# Altium PCB programmer-shield.PcbDoc
Units mil, origin at the board's own origin, x right, y up, seen from the top; angles counter-clockwise.
Board outline 2500 x 1550 mil, 2 copper layers (Top Layer, Bottom Layer), stack 61.756 mil thick; 17 components, 28 nets, 101 pads, 36 vias.
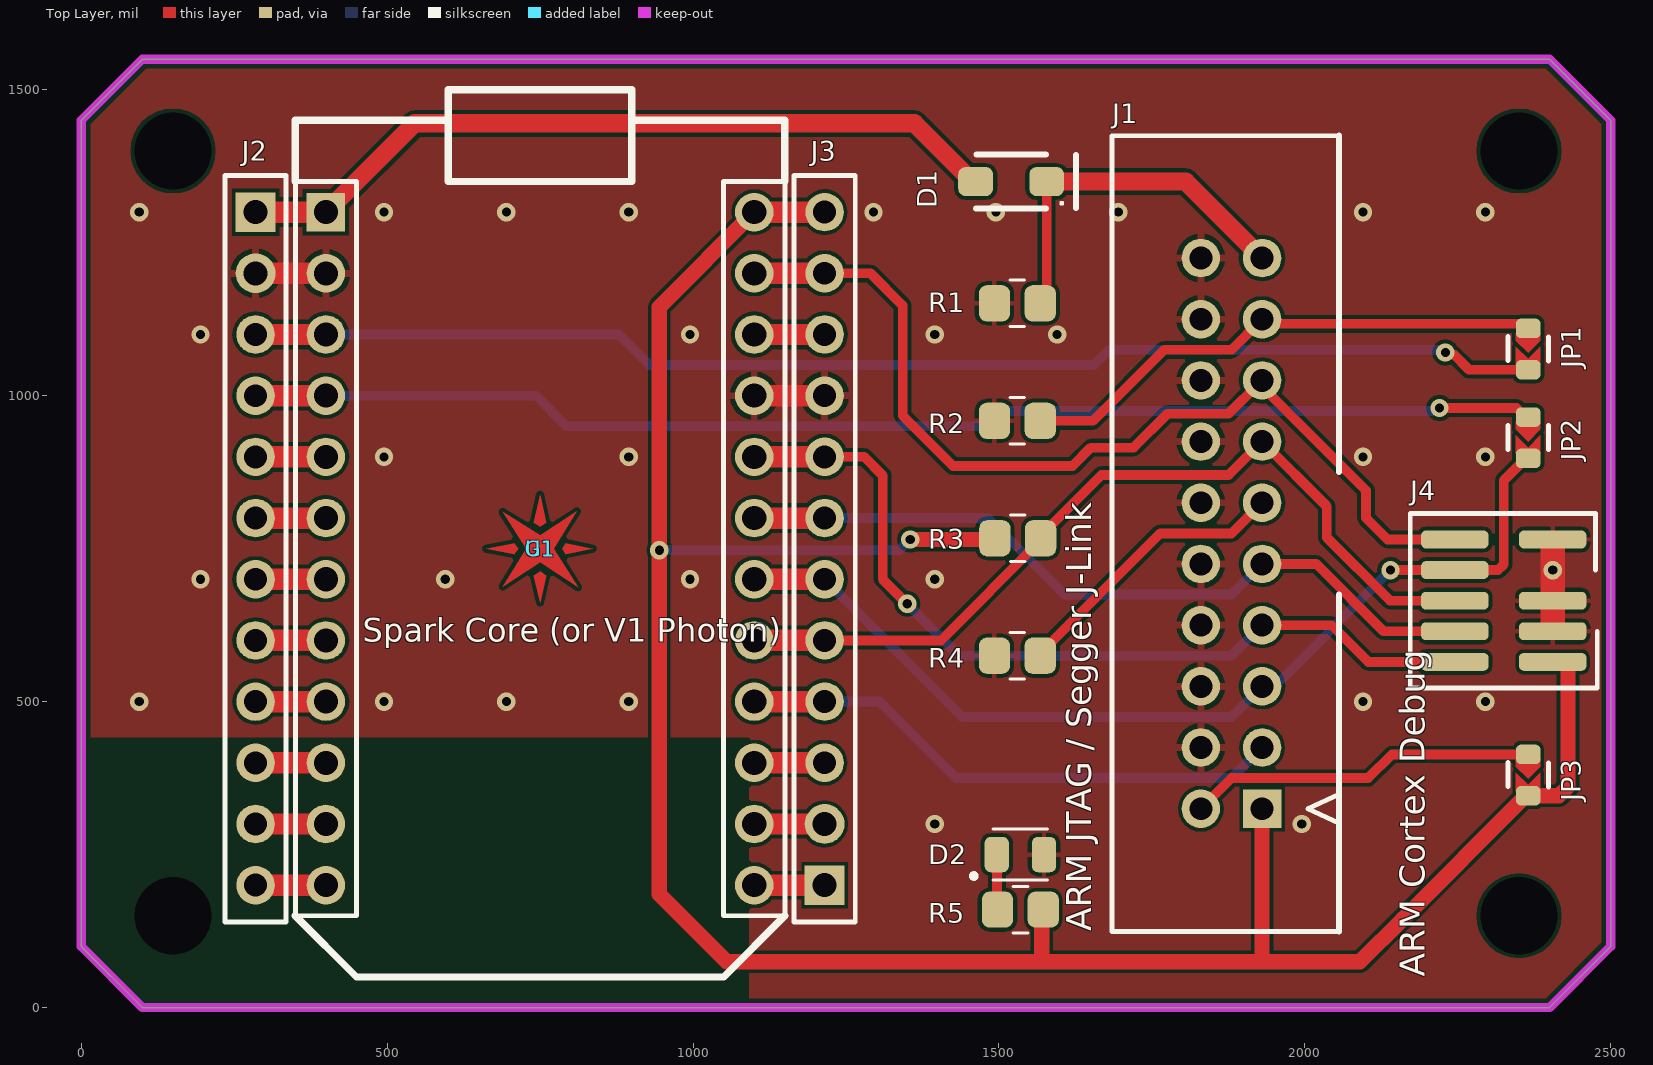
[diagram p0: Top Layer view]
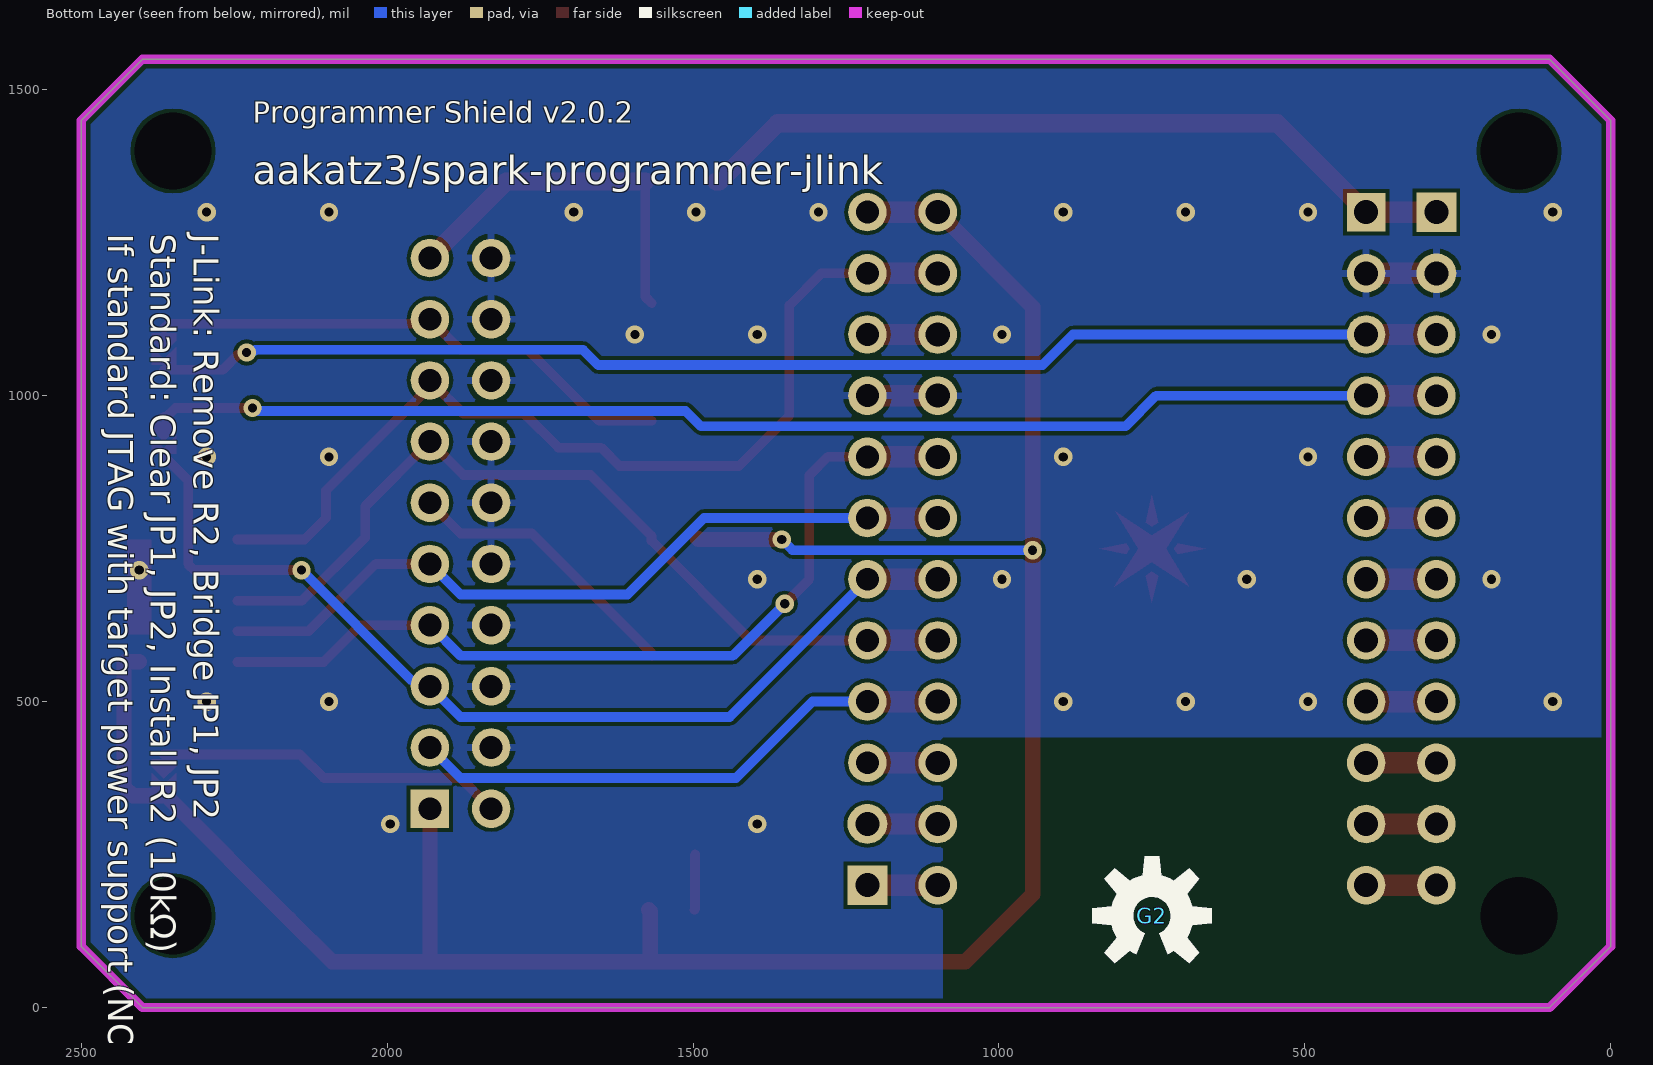
[diagram p1: Bottom Layer view, seen from below]

## Layer stack, top to bottom
Top Solder: solder mask 1, PSR-4000BN, Dk 4.5
Top Layer: signal copper 1.378
Dielectric 1: core 59, Kingboard KB6167F, Dk 4.5
Bottom Layer: signal copper 1.378
Bottom Solder: solder mask 1, PSR-4000BN, Dk 4.5

## Board outline
2400,1550 2500,1450 2500,100 2400,0 100,0 0,100 0,1450 100,1550

## Design rules (kind name [scope] priority, off if disabled: settings)
BoardOutlineClearance [All] p1: gap=15 ignorepadtopadclearanceinfootprint=FALSE
Clearance [All] p1: gap=6 ignorepadtopadclearanceinfootprint=FALSE except(0: Arc-Hole Track-Hole SMDPad-Hole THPad-Hole Via-Hole Fill-Hole Poly-Hole Region-Hole Text-Hole)
ComponentClearance [All] p1: gap=3 collisioncheckmode=3 verticalgap=3 showdistances=TRUE
DiffPairsRouting [All] p1: maxlimit=393.7 minlimit=6 mostfreqgap=8 toplayer_minwidth=6 toplayer_maxwidth=15 toplayer_prefwidth=8 bottomlayer_minwidth=6 bottomlayer_maxwidth=15 bottomlayer_prefwidth=8 maxuncoupledlength=500
Height [All] p1: minheight=0 maxheight=5000 prefheight=500
HoleSize [All] p1: absolutevalues=TRUE maxlimit=265 minlimit=10 maxpercent=80.000 minpercent=20.000
HoleToHoleClearance [All] p1: gap=10 allowstackedmicrovias=FALSE
MinimumAnnularRing [All] p1: minimumring=5
MinimumSolderMaskSliver [All] p1: minsoldermaskwidth=0
PasteMaskExpansion THT [IsThruPin] p1: expansion=-99999
PasteMaskExpansion [All] p2: expansion=0
PlaneClearance [All] p1: clearance=10
PlaneConnect [All] p1: planeconnectstyle=Direct reliefexpansion=16 reliefentries=4 reliefconductorwidth=6 reliefairgap=6
PolygonConnect [All] p1: thpad.connectstyle=Relief thpad.reliefconductorwidth=12 thpad.reliefentries=4 thpad.polygonreliefangle="90 Angle" thpad.airgapwidth=8 smdpad.connectstyle=Relief smdpad.reliefconductorwidth=8 smdpad.reliefentries=4 smdpad.polygonreliefangle="90 Angle" smdpad.airgapwidth=6 via.connectstyle=Direct via.reliefconductorwidth=8 via.reliefentries=4 via.polygonreliefangle="90 Angle" via.airgapwidth=6
RoutingCorners [All] p1: cornerstyle=45-Degree minsetback=49.21 maxsetback=49.21
RoutingVias [All] p1: holewidth=15 width=30 viastyle="Through Hole" minholewidth=13 minwidth=27 maxholewidth=100 maxwidth=114
SilkToSilkClearance [All] p1: silktosilkclearance=0
SilkToSolderMaskClearance [IsPad] p1: minsilkscreentomaskgap=6 clearancetoexposedcopper=TRUE
SolderMaskExpansion SolderMaskExpansion_1 [IsVia] p1: expansion=4 istentingtop=TRUE
SolderMaskExpansion [All] p2: expansion=2.95 istentingtop=FALSE
Width "Power Width" [InNetClass('Power')] p1: maxlimit=300 minlimit=8 preferedwidth=15 minimp=50.000000 maximp=50.000000 favimp=50.000000
Width [All] p2: maxlimit=400 minlimit=6 preferedwidth=8
18 further rules are at their usual default settings.

## Classes and differential pairs
net class Power: +3.3 +5 GND
polygon class PolygonThermal_ON_Width160000_Gap100000: Polygon_1_Net_GND Polygon_2_Net_GND

## Components (designator, comment, footprint, x,y, rotation, side; value= is the part's Value field where it differs from the comment)
D1 "1A 20V Schottky Diode" SOD-123FL 1520,1350 r180 top
D2 "SM0805GCL" LEDC2012X135N_SM0805GCL(Primary) 1535,250 r0 top
G1 "SPARK_LOGO_WITH_PLANE" SPARK_LOGO_PLUS_PLANE 750,750 r0 top locked
G2 "Open Source Hardware Logo This logo indicates the piece of hardware it is found on incorporates a OSHW license and/or adheres to the definition of open source hardware found here: http://freedomdefined.org/OSHW" OSHW-LOGO-M 750,150 r180 bottom locked
J1 "Arm® JTAG 20 connector" TST-110-01-G-D 1930,325 r90 top
J2 "12 contacts Female header" SSW-112-01-G-S 285,1300 r270 top
J3 "12 contacts Female header" SSW-112-01-G-S 1215,200.08 r90 top
J4 "Cortex Debug, 0.050\" 10 Pin" FTSH-105-01-F-DV-007-K 2325,665 r90 top
JP1 "0603 DNP" 0603_JP_Open 2365,1076.25 r90 top
JP2 "0603 DNP" 0603_JP_Open 2365,931.25 r90 top
JP3 "0603 DNP" 0603_JP_Open 2365,380 r90 top
R1 "RES 0805 10K 1%" 0805_RES 1530,1151 r0 top value=10K
R2 "RES 0805 10K 1%" 0805_RES 1530,959 r0 top value=10K
R3 "RES 0805 10K 1%" 0805_RES 1530.72,767 r180 top value=10K
R4 "RES 0805 10K 1%" 0805_RES 1530,575 r0 top value=10K
R5 "RES 0805 698 1%" 0805_RES 1535,160 r0 top value=698
U1 "Particle/Spark Core WiFi development board footprint" "SPARK_CORE _SOCKET" 750,750 r0 top locked

## Footprints (in the part's own frame and the unit in brackets; to place one, negate y for a bottom-side part, rotate by r counter-clockwise, add the part's x,y. Pads: shape width x height; smd on the part's side, far side on the other; paste and mask are expansions set on the pad)
0603_JP_Open [mil] "Jumper (Open/DNP)"
  rrect50% 32x40 smd paste-999: 1(33.75,0) 2(-33.75,0)
  Top Layer region: 26,20 13.75,20 -6.25,0 13.75,-20 26,-20
  Top Layer region: -26.25,0 -16.25,0 3.75,20 -26.25,20
  Top Layer region: -26.25,0 -16.25,0 3.75,-20 -25.75,-20
  silkscreen extent -19,-33 20,33, body extent -11,-59 -11,-59, height 236
0805_RES [mm]
  rrect50% 1.3x1.5 smd: 1(-0.95,0) 2(0.95,0)
  silkscreen extent -0.3,-0.97 0.3,0.97, body extent -1.09,-0.7 1.09,0.7, height 1.1
FTSH-105-01-F-DV-007-K [mil]
  rrect50% 29.13x109.84 smd: 1(-100,-80) 2(-100,80) 3(-50,-80) 4(-50,80) 5(0,-80) 6(0,80) 8(50,80) 9(100,-80) 10(100,80)
  silkscreen extent -143,-153 143,153, body extent -125,-115 125,115, height 241
LEDC2012X135N_SM0805GCL(Primary) [mm]
  rrect50% 1.01x1.47 smd: A(-0.98,0) C(0.98,0)
  silkscreen extent -2.03,-1.05 1.13,1.05, body extent -1,-0.62 1,0.62, height 1.12
OSHW-LOGO-M [mil]
  silkscreen extent -98,-78 98,98
SOD-123FL [mm] "SODFL, 2-Leads, Body 1.65x3.60mm, IPC Low Density"
  rrect50% 1.45x1.2 smd: A(-1.475,0) K(1.475,0)
  silkscreen extent -2.69,-1.12 1.45,1.12, body extent -1.8,-0.9 1.8,0.9, height 0.98
"SPARK_CORE _SOCKET" [mm]
  rect 1.6x1.6 hole 1: 1(-8.89,13.97)
  round 1.6 hole 1: 2(-8.89,11.43) 3(-8.89,8.89) 4(-8.89,6.35) 5(-8.89,3.81) 6(-8.89,1.27) 7(-8.89,-1.27) 8(-8.89,-3.81) 9(-8.89,-6.35) 10(-8.89,-8.89) 11(-8.89,-11.43) 12(-8.89,-13.97) 13(8.89,-13.97) 14(8.89,-11.43) 15(8.89,-8.89) 16(8.89,-6.35) 17(8.89,-3.81) 18(8.89,-1.27) 19(8.89,1.27) 20(8.89,3.81) 21(8.89,6.35) 22(8.89,8.89) 23(8.89,11.43) 24(8.89,13.97)
  silkscreen extent -10.16,-17.78 10.16,19.05, body extent -10.16,-17.78 10.16,19.26, height 15.7
SPARK_LOGO_PLUS_PLANE [mil]
  Top Layer region: 0,88 -10,42 0,36 10,42 0,88
  Top Layer region: 42,9 36,0 42,-9 86,0 42,9
  Top Layer region: -61,60 -23,0 -61,-62 0,-22 62,-63 22,0 60,61 0,22 -61,60
  Top Layer region: -88,0 -42,-9 -36,0 -42,9 -88,0
  Top Layer region: -10,-44 0,-88 10,-44 0,-37 -10,-44
SSW-112-01-G-S [mm]
  rect 1.65x1.65 / inner round 1.65 / far side rect 1.65x1.65 hole 1: 1(0,0)
  round 1.65 hole 1: 2(2.54,0)
  round 1.6 hole 0.95: 3(5.08,0) 4(7.62,0) 5(10.16,0) 6(12.7,0) 7(15.24,0) 8(17.78,0) 9(20.32,0) 10(22.86,0) 11(25.4,0) 12(27.94,0)
  silkscreen extent -1.52,-1.27 29.46,1.27, body extent -1.52,-1.21 29.46,1.21, height 8.51
TST-110-01-G-D [mm] "2.54mm pitch, 20 pin, header; shrouded"
  rect 1.6x1.6 / inner round 1.6 / far side rect 1.6x1.6 hole 0.95: 1(0,0)
  round 1.6 hole 0.95: 2(0,2.54) 3(2.54,0) 4(2.54,2.54) 5(5.08,0) 6(5.08,2.54) 7(7.62,0) 8(7.62,2.54) 9(10.16,0) 10(10.16,2.54) 11(12.7,0) 12(12.7,2.54) 13(15.24,0) 14(15.24,2.54) 15(17.78,0) 16(17.78,2.54) 17(20.32,0) 18(20.32,2.54) 19(22.86,0) 20(22.86,2.54)
  silkscreen extent -5.1,-3.2 27.94,6.22, body extent -5.08,-3.11 27.94,6.16, height 8.89

## Part data
D1: library part NRVB120VLSFT1G, "1A 20V Schottky Diode SOD-123FL", Manufacturer="On Semiconductor", Package Class="Surface Mount", PCB Package=SOD-123FL, Supplier Part Number 1=NRVB120VLSFT1GOSCT-ND, ComponentLink1Description="Manufacturer Website", ComponentLink2Description="Component Datasheet", ComponentLink2URL=https://www.onsemi.com/pub/Collateral/MBR120VLSFT1-D.PDF, ComponentLink3Description="Octopart Link", Description in Visual="1A 20V Schottky Diode SOD-123FL", Diode Configuration=Single, Grade="AEC-Q101 (Automotive - Discretes)", If (Amps)=1, Ifsm (Amps)=45, Manufacturer P/N=NRVB120VLSFT1G, P/N=NRVB120VLSFT1G, Supplier 1=Digi-Key, Type=Schottky, Vf (V)=0.3, VRRM (V)=20
D2: "Green 574nm LED Indication - Discrete 1.9V 0805 (2012 Metric)", Case Code (Imperial)=0805, Case Code (Metric)=2012, Color=Green, Forward Current=2mA, Forward Voltage=1.9V, Lens Color=Colorless, Manufacturer=Bivar, Max Operating Temperature=80°C, Min Operating Temperature=-30°C, Package Quantity=4000, Supplier Part Number 1=492-2525-1-ND, Case/Package=0805, Category=LEDs, Dominant Wavelength=574nm, Height=0.8mm, Illumination Color=Green, Lead Free="Lead Free", Length=2mm, Lens Transparency=Clear, Luminous Intensity=3.6mcd, Manufacturer Part Number=SM0805GCL, Mount="Surface Mount", Packaging="Tape and Reel", Supplier 1=Digi-Key, Test Current=2mA, Viewing Angle=130°, Width=1.2mm
G1: Package=SPARK_LOGO_PLUS_PLANE, DeviceSetName=SPARK_LOGO_WITH_PLANE, GateName_1=G$1, LibraryName=Particle, SymbolName_1=SPARK_LOGO
G2: library part OSHW-LOGOM, Package=OSHW-LOGO-M, DeviceName=M, DeviceSetName=OSHW-LOGO, GateName_1=G$1, LibraryName=Particle, SymbolName_1=OSHW-LOGO
J1: library part "ARM Standard Debug", "20 Pin Shrouded Header, 0.100\"", Manufacturer=Generic, Manufacturer P/N=Various, Supplier Part Number 1=SAM15640-ND, ComponentLink1Description="Pinout Reference", ComponentLink1URL=http://infocenter.arm.com/help/index.jsp?topic=/com.arm.doc.100893_0100_02_en/ris1452189032721.html, Contact Finish=Gold, Description in Visual="20 Pin Shrouded Header, 0.100\"", Gender=Male, Number of Contacts=20, Number of Rows=2, Orientation=Vertical, P/N="ARM Standard Debug", Pitch="0.100\"", Supplier 1=Digi-Key, Supplier 2=Digi-Key, Supplier 3=Digi-Key, Supplier Part Number 2=SAM13926CT-ND, Supplier Part Number 3=SAM11250-ND
J2 J3: library part SSW-112-01-G-S, "Connector Female Header 1X12 vertical 12 contacts  pitch Gold finish", Manufacturer=SamTec, Supplier Part Number 1=SAM1209-12-ND, ComponentLink1Description="Manufacturer Website", ComponentLink1URL=https://www.samtec.com, ComponentLink2Description="Component Datasheet", ComponentLink2URL=http://suddendocs.samtec.com/catalog_english/ssw_th.pdf, ComponentLink3Description="Octopart Link", ComponentLink3URL=https://octopart.com/ssw-112-01-g-s-003-samtec-15802181?r=sp, Contact Finish=Gold, Description in Visual="Con Hdr Female 12 contacts vertical 1X12", Gender=Female, Manufacturer P/N=SSW-112-01-G-S, Number of Contacts=12, Number of Rows=1.00, Orientation=vertical, P/N=SSW-112-01-G-S, Supplier 1=Digi-Key
J4: library part "ARM Cortex Debug", "10 Pin Shrouded Header, 0.050\", Key Pin 7", Manufacturer=Samtech, Manufacturer P/N=Various, Supplier Part Number 1=SAM8994-ND, ComponentLink1Description="Pinout Reference", ComponentLink1URL=http://infocenter.arm.com/help/topic/com.arm.doc.faqs/attached/13634/cortex_debug_connectors.pdf, Contact Finish=Gold, Description in Visual="10 Pin Shrouded Header, 0.050\", Key Pin 7", Gender=Male, Number of Contacts=10, Number of Rows=2, Orientation=Vertical, P/N="ARM Cortex Debug", Pitch="0.050\"", Supplier 1=Digi-Key, Supplier 2=Digi-Key, Supplier 3=Digi-Key, Supplier 4=Digi-Key, Supplier 5=Digi-Key, Supplier 6=Digi-Key, Supplier 7=Digi-Key, Supplier 8=Digi-Key, Supplier Part Number 2=3M11932-ND, Supplier Part Number 3=MHC20K-ND, Supplier Part Number 4=ED10524-ND, Supplier Part Number 5=S9172-ND, Supplier Part Number 6=MHC20E-ND, Supplier Part Number 7=A33165-ND, Supplier Part Number 8=MHC20E-ND
JP1 JP2 JP3: library part "0603 link (Open)", "0Ω link, Solder Bridge/SMD, Open", Description in Visual="0Ω link, Solder Bridge/SMD, Open", P/N="0603 link (Open)"
R1 R2 R3 R4: "Resistor Surface Mount, 10K Ohms, 0805 Footprint, 1% Tolerance 0.125W", Manufacturer=Various, PCB Package=0805, Power_Rating=0.125W, Tolerance=1%, Description in Visual="Res SMT 10K 0805  1%  0.125W", Manufacturer P/N=Various, P/N="RES 0805 10K 1%", Tol=1%, Val=10K
R5: "Resistor Surface Mount, 698 Ohms, 0805 Footprint, 1% Tolerance 0.125W", Manufacturer=Various, PCB Package=0805, Power_Rating=0.125W, Tolerance=1%, Description in Visual="Res SMT 698 0805  1%  0.125W", Manufacturer P/N=Various, P/N="RES 0805 698 1%", Tol=1%, Val=698
U1: library part SPARK_CORE

## Free pads (board coordinates)
  round 0 / inner round 100 / far side round 0 hole 125.98 unplated: MH1(2350,1400) MH2(2350,150) MH3(150,150) MH4(150,1400)

## Via types
v1: diameter 30, hole 15, Top Layer to Bottom Layer, tented both sides, 36 vias

## Nets (pads, with @x,y where several pads share a name; then routed paths per layer and width w, separated by ;. In a path a pad name is that pad's centre, name@x,y a point inside that pad or via, vN(x,y) a via of type N, cw(c..) or ccw(c..) an arc to the next point about the centre after c; other vN are vias at no path point)
+3.3: J1.1 J3.12 J4.1 JP3.2 R3.2 R5.2 U1.24 | length 4074.7
  Top Layer w25: v1@947.5,750 v1(945,747.5) ; U1.24 945,1145 v1@945,755 ; v1(1355,765) 1491.31,765 R3.2 ; R5.2 1570,157.6 1570,75 ; J1.1 1930,75 ; J4.1 2427.93,565 2430,562.93 2430,360.89 2415.36,346.25 JP3.2 2361,346.25 2357.5,342.75 2357.5,342.5 2160,145 2090,75 1930,75 ; v1(945,747.5) v1@945,755 ; v1(945,747.5) 945,185 1055,75 1570,75 ; v1(945,747.5) v1@945,755 ; 1570,75 1930,75
  Top Layer w35: U1.24 U1.24 1214.96,1300.04 J3.12
  Bottom Layer w16: v1(945,747.5) 1337.5,747.5 v1(1355,765)
+3.3_ANA: J3.10 U1.22 | length 115
  Top Layer w35: U1.22 U1.22 1214.96,1100.04 J3.10
+5: D1.K J2.1 U1.1 | length 1276.3
  Top Layer w30: U1.1 545,1445 1362.01,1445 1457.01,1350 D1.K
  Top Layer w35: J2.1 U1.1
\RST: J1.15 J3.11 J4.10 U1.23 | length 1578.9
  Top Layer w16: J3.11 1289.92,1200.08 1342.6,1147.4 1342.6,967.4 1425,885 1620,885 1650,915 1720,915 1775.5,970.5 1875.5,970.5 1925,1020 J1.15 1930,1015 2100,845 2100,800 2135,765 J4.10
  Top Layer w35: U1.23 U1.23 1214.96,1200.04 J3.11
\TRST: J1.3 J3.4 U1.16 | length 902.6
  Top Layer w35: U1.16 U1.16 1214.96,500.04 J3.4
  Bottom Layer w16: J3.4 1304.92,500.08 1430,375 1880,375 J1.3
A0: J2.12 U1.12 | length 115
  Top Layer w35: J2.12 U1.12
A1: J2.11 U1.11 | length 115
  Top Layer w35: J2.11 U1.11
A2: J2.10 U1.10 | length 115
  Top Layer w35: J2.10 U1.10
A3: J2.9 U1.9 | length 115
  Top Layer w35: J2.9 U1.9
A4: J2.8 U1.8 | length 115
  Top Layer w35: J2.8 U1.8
A5: J2.7 U1.7 | length 115
  Top Layer w35: J2.7 U1.7
A6: J2.6 U1.6 | length 115
  Top Layer w35: J2.6 U1.6
A7: J2.5 U1.5 | length 115
  Top Layer w35: J2.5 U1.5
D0: J3.1 U1.13 | length 115
  Top Layer w35: U1.13 U1.13 1214.96,200.04 J3.1
D1: J3.2 U1.14 | length 115
  Top Layer w35: U1.14 U1.14 1214.96,300.04 J3.2
D2: J3.3 U1.15 | length 115
  Top Layer w35: U1.15 U1.15 1214.96,400.04 J3.3
GND: D2.C J1.4 J1.6 J1.8 J1.10 J1.12 J1.14 J1.16 J1.18 J1.20 J2.2 J3.9 J4.3 J4.5 J4.9 R1.1 R2.1 R4.1 U1.2 U1.21 | length 230
  Top Layer w35: J2.2 U1.2 ; U1.21 U1.21 1214.96,1000.04 J3.9
  other v1: 1395,300 1995,300 95,500 495,500 695,500 895,500 2095,500 2295,500 195,700 595,700 995,700 1395,700 2405,715 495,900 895,900 2095,900 2295,900 195,1100 995,1100 1395,1100 1595,1100 95,1300 495,1300 695,1300 895,1300 1295,1300 1495,1300 1695,1300 2095,1300 2295,1300
NC/DBACK: D1.A J1.19 R1.2 | length 607.1
  Top Layer w16: R1.2 1578.07,1161.67 D1.A
  Top Layer w30: D1.A 1805,1350 J1.19
NC/DBGRQ: J1.17 JP1.1 R2.2 | length 872.6
  Top Layer w16: R2.2 1654,959 1770,1075 1880,1075 J1.17 1937.5,1117.5 2357.5,1117.5 JP1.1
NetD2_A: D2.A R5.1 | length 90.5
  Top Layer w16: D2.A 1497.01,249.41 1497.01,160.59 R5.1
RTCK: J1.11 R4.2 | length 468.5
  Top Layer w16: R4.2 1567.4,578.94 1763.46,775 1880,775 J1.11
RXD: J2.4 JP2.1 U1.4 | length 2119.4
  Top Layer w16: v1(2220,980) 2346,980 2361,965 JP2.1
  Top Layer w35: J2.4 U1.4
  Bottom Layer w16: U1.4 743.03,1000 793.03,950 1487.12,950 1512.12,975 2215,975 v1(2220,980)
SWDCLK/TCK: J1.9 J3.7 J4.4 U1.19 | length 1263.1
  Top Layer w16: J1.9 2018.68,725 2128.68,615 J4.4
  Top Layer w35: U1.19 U1.19 1214.96,800.04 J3.7
  Bottom Layer w16: J3.7 1482.14,800.08 1607.22,675 1880,675 J1.9
SWDIO/TMS: J1.7 J3.8 J4.2 U1.20 | length 1424.8
  Top Layer w16: J3.8 1279.92,900.08 1310,870 1310,700 v1(1350,660) ; J1.7 2043.68,625 2103.68,565 J4.2
  Top Layer w35: U1.20 U1.20 1214.96,900.04 J3.8
  Bottom Layer w16: v1(1350,660) 1435,575 1880,575 J1.7
SWO/TDO: J1.13 J3.5 J4.6 R3.1 U1.17 | length 1421.8
  Top Layer w16: J3.5 1405.13,600.08 1568.12,763.06 R3.1 1568.12,770.94 1667.68,870.5 1875.5,870.5 J1.13 2035.71,819.29 2035.71,768.28 2138.99,665 J4.6
  Top Layer w35: U1.17 U1.17 1214.96,600.04 J3.5
TDI: J1.5 J3.6 J4.8 JP2.2 U1.18 | length 1613.6
  Top Layer w16: v1(2140,715) 2315.63,715 2325,724.37 2325,861.5 2361,897.5 JP2.2
  Top Layer w35: U1.18 U1.18 1214.96,700.04 J3.6
  Bottom Layer w16: J3.6 1440.08,475 1880,475 1938.99,533.99 1958.99,533.99 v1(2140,715)
TXD: J2.3 JP1.2 U1.3 | length 2124.5
  Top Layer w16: v1(2229.68,1070.5) 2232.36,1067.82 2242.54,1067.82 2267.86,1042.5 JP1.2
  Top Layer w35: J2.3 U1.3
  Bottom Layer w16: U1.3 878.86,1100 928.86,1050 1655,1050 1680,1075 2215.28,1075 2217.1,1073.17 2227,1073.17 v1(2229.68,1070.5)
VCC/NC: J1.2 JP3.1 | length 571.8
  Top Layer w16: J1.2 1880,375 2103.48,375 2142.23,413.75 JP3.1

## Polygon pours and split planes (outlines as drawn)
GND on Bottom Layer "Polygon_1_Net_GND" (solid, remove dead copper, pour order 1): -8,442 1092,442 1092,-8 2508,-8 2508,1558 -8,1558
GND on Top Layer "Polygon_2_Net_GND" (solid, remove dead copper, pour order 0): -8,442 -8,1558 2508,1558 2508,-8 1092,-8 1092,442

## Keep-outs
Keep-Out Layer:
  lines w0: 0,100 0,1450 100,1550 2400,1550 2500,1450 2500,100 2400,0 100,0 0,100
  lines w15: 0,100 0,1450 100,1550 2400,1550 2500,1450 2500,100 2400,0 100,0 0,100

## Other copper
Top Layer:
  rectangle net GND: 2385,610 2425,765

## Silkscreen, mask and mechanical layers (free items; w line width, h text height)
Top Overlay:
  text "Spark Core (or V1 Photon)" at 460,585 h65
  text "ARM JTAG / Segger J-Link" at 1665,125 h70 r90
  text "ARM Cortex Debug" at 2210,50 h70 r90
Bottom Overlay:
  text "Programmer Shield v2.0.2" at 2220,1435 h59.5
  text "aakatz3/spark-programmer-jlink" at 2220,1330 h80
  text "J-Link: Remove R2, Bridge JP1, JP2 / Standard: Clear JP1, JP2, Install R2 (10kΩ) / If standard JTAG with target power support (NO J-LINK) @3.3V: Bridge JP3" at 2470,1265 h70 r90
Board Outline:
  the board outline again, w1
CAM Title Block:
  drawing of 63 lines, arcs and shapes, not listed
  text "1" at 130.71,6316.6 h48.36
  text "2" at 2873.83,6316.6 h48.36
  text "3" at 5626.96,6316.6 h48.36
  text "4" at 8372.58,6316.6 h48.36
  text "A" at -1142.46,5354.46 h48.36
  text "A" at 9658.26,5354.46 h48.36
  text "B" at -1137.46,3229.25 h48.36
  text "B" at 9662.43,3229.25 h48.36
  text "Reference Designs ARE PROVIDED \"AS IS\" AND \"WITH ALL FAULTS. SPARK LABS, INC" at 4300,1376 h47.6
  text "(\"SPARK\") DISCLAIMS ALL OTHER WARRANTIES, EXPRESS OR IMPLIED, REGARDING" at 4300,1292 h47.6
  text "PRODUCTS OR THE REFERENCE DESIGNS, INCLUDING BUT NOT LIMITED TO, ANY" at 4300,1208 h47.6
  text "IMPLIED WARRANTIES OF MERCHANTABILITY, FITNESS FOR A PARTICULAR PURPOSE," at 4300,1124 h47.6
  text "C" at -1138.3,1104.88 h48.36
  text "C" at 9661.6,1104.88 h48.36
  text "OR NON-INFRINGEMENT." at 4300,1040 h47.6
  text "Spark may make changes to specifications and product descriptions at any" at 4300,872 h47.6
  text "time, without notice. The Customer must not rely on the absence or" at 4300,788 h47.6
  text "characteristics of any features or instructions marked \"reserved\" or" at 4300,704 h47.6
  text "\"undefined.\" Spark reserves these for future definition and shall have" at 4300,620 h47.6
  text "no responsibility whatsoever for conflicts or incompatibilities arising" at 4300,536 h47.6
  text "from future changes to them. The product information on the Web Site or" at 4300,452 h47.6
  text "Materials is subject to change without notice. Do not finalize a design" at 4300,368 h47.6
  text "with this information." at 4300,284 h47.6
  text "Spark is a registered trademark." at 4300,200 h47.6
  text "D" at -1140.8,-1020.33 h48.36
  text "D" at 9659.1,-1020.33 h48.36
  text "Title:" at 6069.69,-1101.2 h65.87
  text "'.Pcb_File_Name_No_Path'" at 6419.88,-1101.2 h63.36
  text "Spark Core Programming Interface" at 6319.83,-1199.17 h32.52
  text "Updated to support Segger J-Link and add Cortex Debug Header" at 6319.83,-1259.2 h32.52
  text "Desc:" at 6069.69,-1287.96 h42.52
  text "Designed for Spark Core or Photon V1" at 6319.83,-1319.23 h32.52
  text "Letter" at 6269.8,-1483.06 h42.52
  text "Auth:" at 6670.01,-1483.06 h42.52
  text ".ProjAuth" at 6920.14,-1483.06 h42.52
  text "Proj:" at 7769.76,-1483.06 h42.52
  text ".ProjShrtName" at 7970.5,-1483.06 h42.52
  text "Size:" at 6069.69,-1488.06 h42.52
  text "1" at 8069.92,-1622.71 h37.52
  text "1" at 8370.08,-1622.71 h37.52
  text "Date:" at 6069.69,-1628.96 h37.52
  text "'.ModifiedDate'" at 6319.83,-1628.96 h37.52
  text "Time:" at 7070.22,-1628.96 h37.52
  text "'.ModifiedTime'" at 7280.34,-1628.96 h37.52
  text "Sheet" at 7769.76,-1628.96 h37.52
  text "of" at 8220,-1628.96 h37.52
  text ".ProjGitURL" at 6320.5,-1707 h37.52
  text "Repo:" at 6069.69,-1719 h37.52
  text "File:" at 6069.69,-1819.05 h37.52
  text "'.Pcb_File_Name'" at 6319.83,-1819.05 h37.52
  text "1" at 130.71,-1982.47 h48.36
  text "2" at 2873.83,-1982.47 h48.36
  text "3" at 5626.96,-1982.47 h48.36
  text "4" at 8372.58,-1982.47 h48.36

## Dimensions
150,1400 to 2350,1400 on Open (Mech16)
150,150 to 150,1400 on Open (Mech16)
2500,0 to 2500,1550 on Open (Mech16)
0,-100 to 2500,-100 on Open (Mech16)

## Text inside footprints (layer, text, board x,y; h text height)
R1: Librarian Notes "HISTORY: MT 021711, OLDER FOOTPRINT. STANDARD MAX HEIGHT 1.1MM" at 1463,1187 h1; Librarian Notes "LOCATION: SURFACEMOUNT2LEAD.PCBLIB" at 1463,1189 h1; Librarian Notes "2. SS 102512, ADDED SILKSCREEN." at 1463,1185 h1
R2: Librarian Notes "HISTORY: MT 021711, OLDER FOOTPRINT. STANDARD MAX HEIGHT 1.1MM" at 1463,995 h1; Librarian Notes "LOCATION: SURFACEMOUNT2LEAD.PCBLIB" at 1463,997 h1; Librarian Notes "2. SS 102512, ADDED SILKSCREEN." at 1463,993 h1
R3: Librarian Notes "HISTORY: MT 021711, OLDER FOOTPRINT. STANDARD MAX HEIGHT 1.1MM" at 1597.72,731 h1 r180; Librarian Notes "LOCATION: SURFACEMOUNT2LEAD.PCBLIB" at 1597.72,729 h1 r180; Librarian Notes "2. SS 102512, ADDED SILKSCREEN." at 1597.72,733 h1 r180
R4: Librarian Notes "HISTORY: MT 021711, OLDER FOOTPRINT. STANDARD MAX HEIGHT 1.1MM" at 1463,611 h1; Librarian Notes "LOCATION: SURFACEMOUNT2LEAD.PCBLIB" at 1463,613 h1; Librarian Notes "2. SS 102512, ADDED SILKSCREEN." at 1463,609 h1
R5: Librarian Notes "HISTORY: MT 021711, OLDER FOOTPRINT. STANDARD MAX HEIGHT 1.1MM" at 1468,196 h1; Librarian Notes "LOCATION: SURFACEMOUNT2LEAD.PCBLIB" at 1468,198 h1; Librarian Notes "2. SS 102512, ADDED SILKSCREEN." at 1468,194 h1